# EAGLE board schematic (EAGLE 7.5.0)
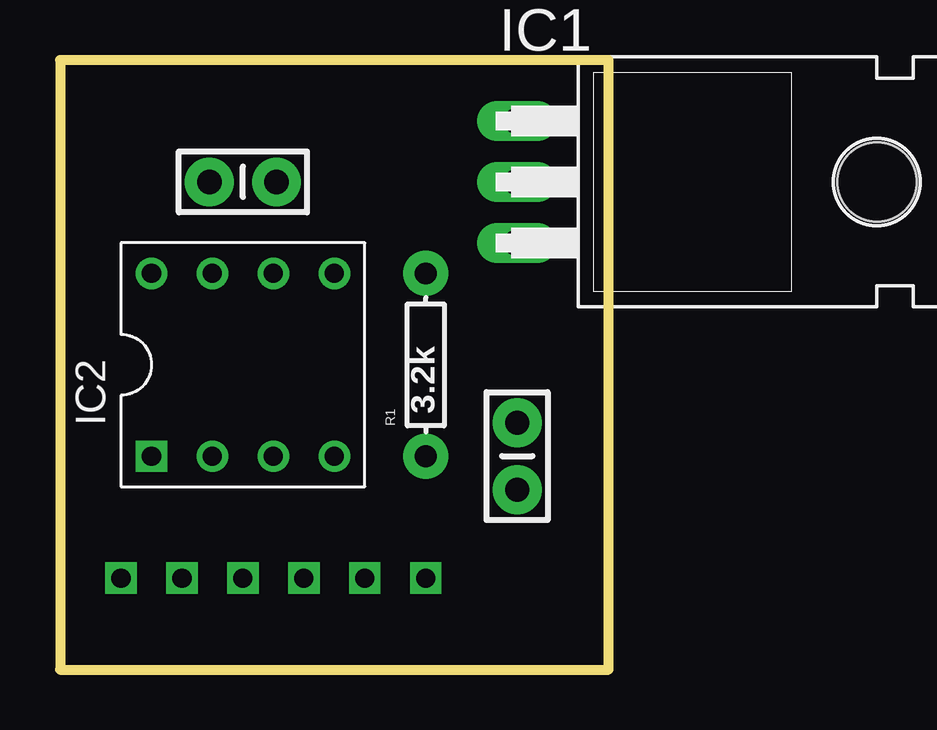
[diagram p0: board, top side]
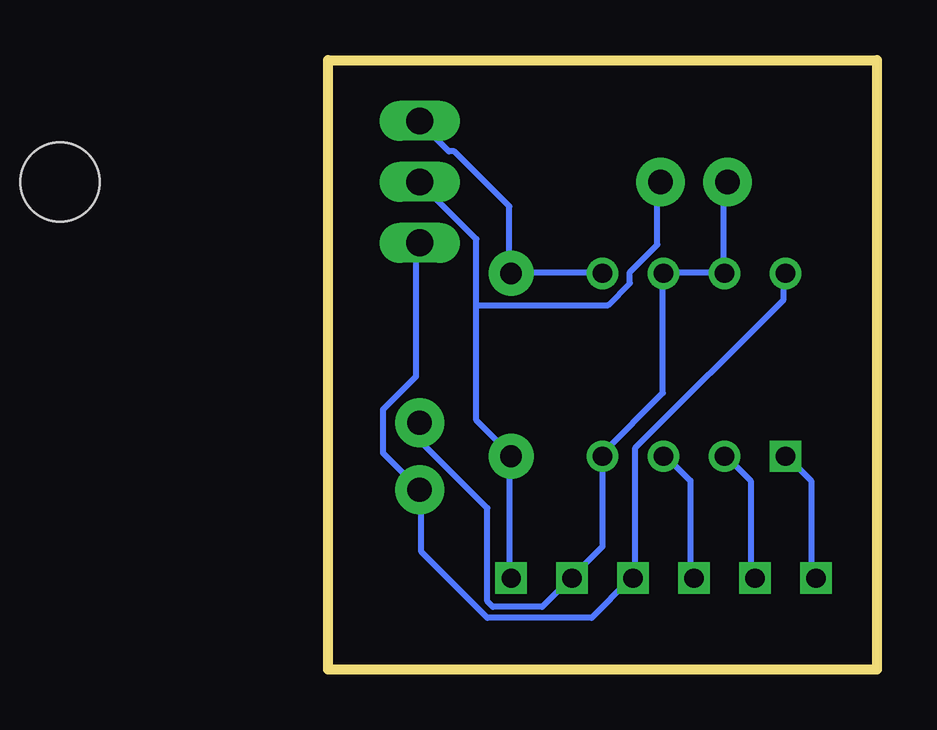
[diagram p1: board, bottom side, seen from below]

Size 22.86 x 25.4 mm. Coordinates in mm from the lower left corner, seen from the top.
Outline: 0,0 22.86,0 22.86,25.4 0,25.4 0,0
Copper layers (1*16): Top 0.035mm / dielectric 1.5mm / Bottom 0.035mm
Design rules "default": minimum track width 10mil, minimum drill 24mil, track to track 8mil, track to pad 8mil, pad to pad 8mil, via to via 8mil, smd to smd 8mil, copper to edge 40mil, drill to drill 8mil, minimum pad ring 10mil, minimum via ring 8mil, stop-mask expansion 4mil, vias tented up to drill 0mil, thermal gap 10mil

## Footprints (pad centres in the part's own frame; a part is rotated, then mirrored left to right if it is on the bottom)
CAP-PTH-SMALL-KIT = drill 1.016 pad 2.032: 1 -1.397,0; 2 1.397,0
TO220H = drill 1.118 long: 1 -2.54,-10.16; 2 0,-10.16; 3 2.54,-10.16 | hole 3.302: 0,4.826
DIP8 = drill 0.8 square: 1 -3.81,-3.81 | drill 0.8: 2 -1.27,-3.81; 3 1.27,-3.81; 4 3.81,-3.81; 5 3.81,3.81; 6 1.27,3.81; 7 -1.27,3.81; 8 -3.81,3.81
AXIAL-0.3 = drill 0.9 pad 1.88: P$1 -3.81,0; P$2 3.81,0
PS_CONN = drill 0.8 square: 5V 0,-1.27; CS 0,6.35; GND 0,-3.81; PSVCC 0,-6.35; SCK 0,3.81; SDIO 0,1.27

## Placement (x,y rotation side)
C0.1  0.1uF  [CAP-PTH-SMALL-KIT]  19.05,8.89 90 top
C1  1uF  [CAP-PTH-SMALL-KIT]  7.62,20.32 180 top
IC1  317T  [TO220H]  29.21,20.32 270 top
IC2  IC_MCP4131  [DIP8]  7.62,12.7 0 top
R1  3.2k  [AXIAL-0.3]  15.24,12.7 90 top
U$1  [PS_CONN]  8.89,3.81 90 top

## Library data of the parts
C0.1 C1 = SparkFun-Capacitors; PROD_ID: CAP-08370
IC1 = linear
IC2 = dp_devices
R1 = SparkFun-Passives
U$1 = SLV

## Nets
GND: C0.1.2 C1.2 IC2.4 IC2.6 IC2.7 U$1.GND
N$1: IC1.1 IC2.5 R1.P$2
N$2: IC2.3 U$1.SDIO
N$3: IC2.2 U$1.SCK
N$4: C1.1 IC1.2 R1.P$1 U$1.PSVCC
N$5: IC2.1 U$1.CS
VCC: C0.1.1 IC1.3 IC2.8 U$1.5V

## Tracks (layer width: path | path; a pad name or v marks a point on that pad's centre or on a via)
GND
  Bottom 0.254: 6.4,16.56 8.69,16.56 IC2.6 8.91,16.33 8.91,11.53 11.43,9.02 IC2.4 11.43,5.13 12.57,3.99 U$1.GND 12.8,3.76 13.95,2.62 16,2.62 16.23,2.85 16.23,6.73 18.97,9.47 18.97,10.16 C0.1.2 | 6.4,16.56 6.4,20.22 C1.2 | 6.4,16.56 IC2.7
N$1
  Bottom 0.254: IC2.5 11.43,16.56 15.09,16.56 R1.P$2 15.32,16.56 15.32,19.3 17.6,21.59 17.83,21.59 18.97,22.73 IC1.1
N$2
  Bottom 0.254: U$1.SDIO 7.77,3.99 7.77,7.87 8.69,8.79 IC2.3
N$3
  Bottom 0.254: U$1.SCK 5.26,3.99 5.26,7.87 6.17,8.79 IC2.2
N$4
  Bottom 0.254: U$1.PSVCC 15.32,3.99 15.32,8.79 R1.P$1 15.32,9.02 16.69,10.39 16.69,15.19 | 16.69,15.19 16.69,17.93 18.97,20.22 IC1.2 | 16.69,15.19 11.2,15.19 10.29,16.1 10.29,16.56 9.14,17.7 9.14,20.22 C1.1
N$5
  Bottom 0.254: U$1.CS 2.74,3.99 2.74,7.87 3.66,8.79 IC2.1
VCC
  Bottom 0.254: IC1.3 19.2,17.7 19.2,12.22 20.57,10.85 20.57,9.02 C0.1.1 18.97,7.42 18.97,4.9 16.23,2.16 11.89,2.16 10.29,3.76 U$1.5V 10.06,3.99 10.06,9.25 3.89,15.42 3.89,16.33 IC2.8